# EAGLE board ShiftRegister32-1.0 (EAGLE 6.4)
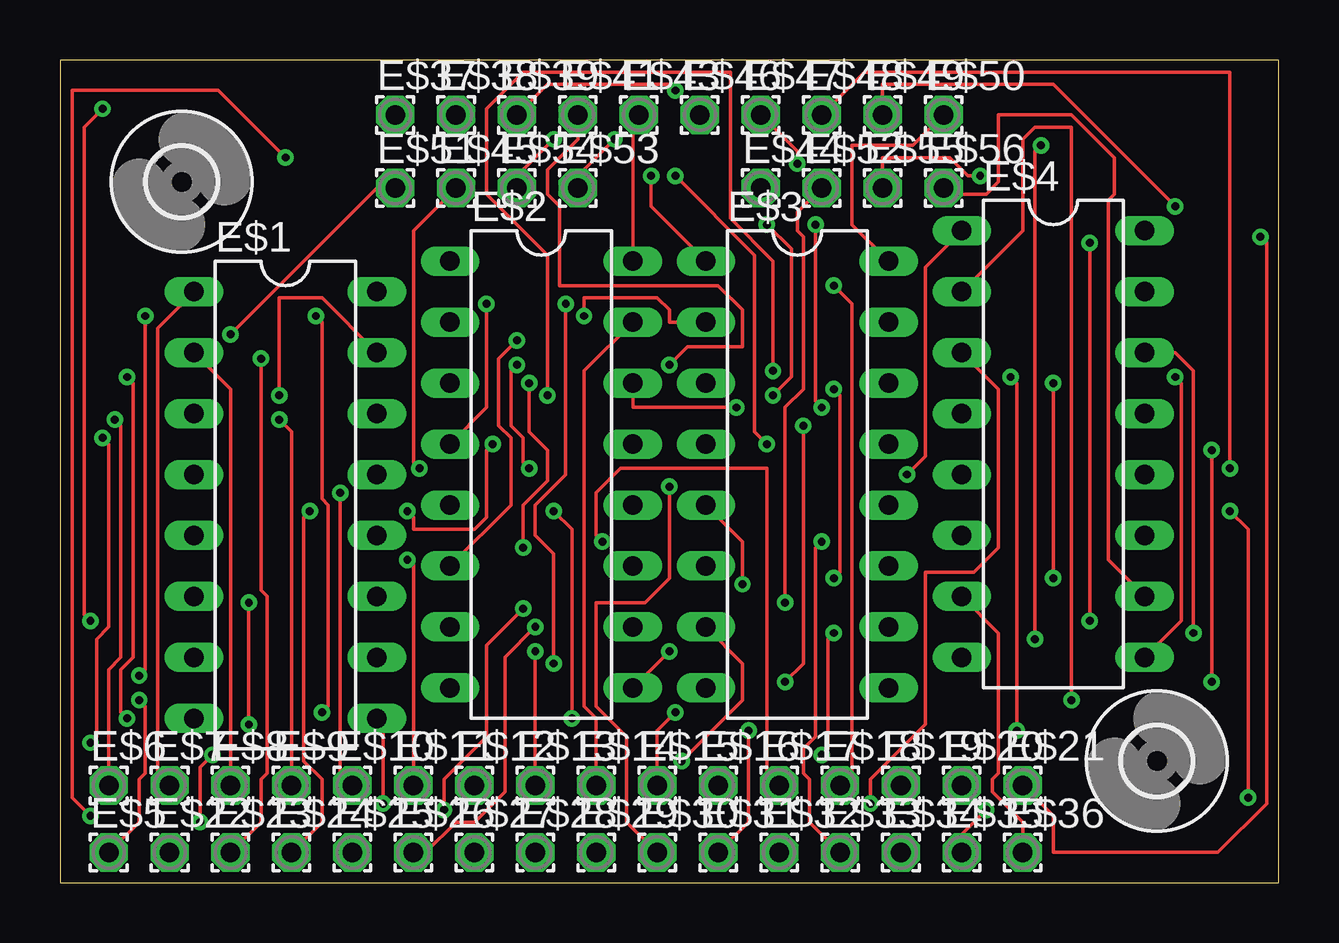
[diagram p0: board, top side]
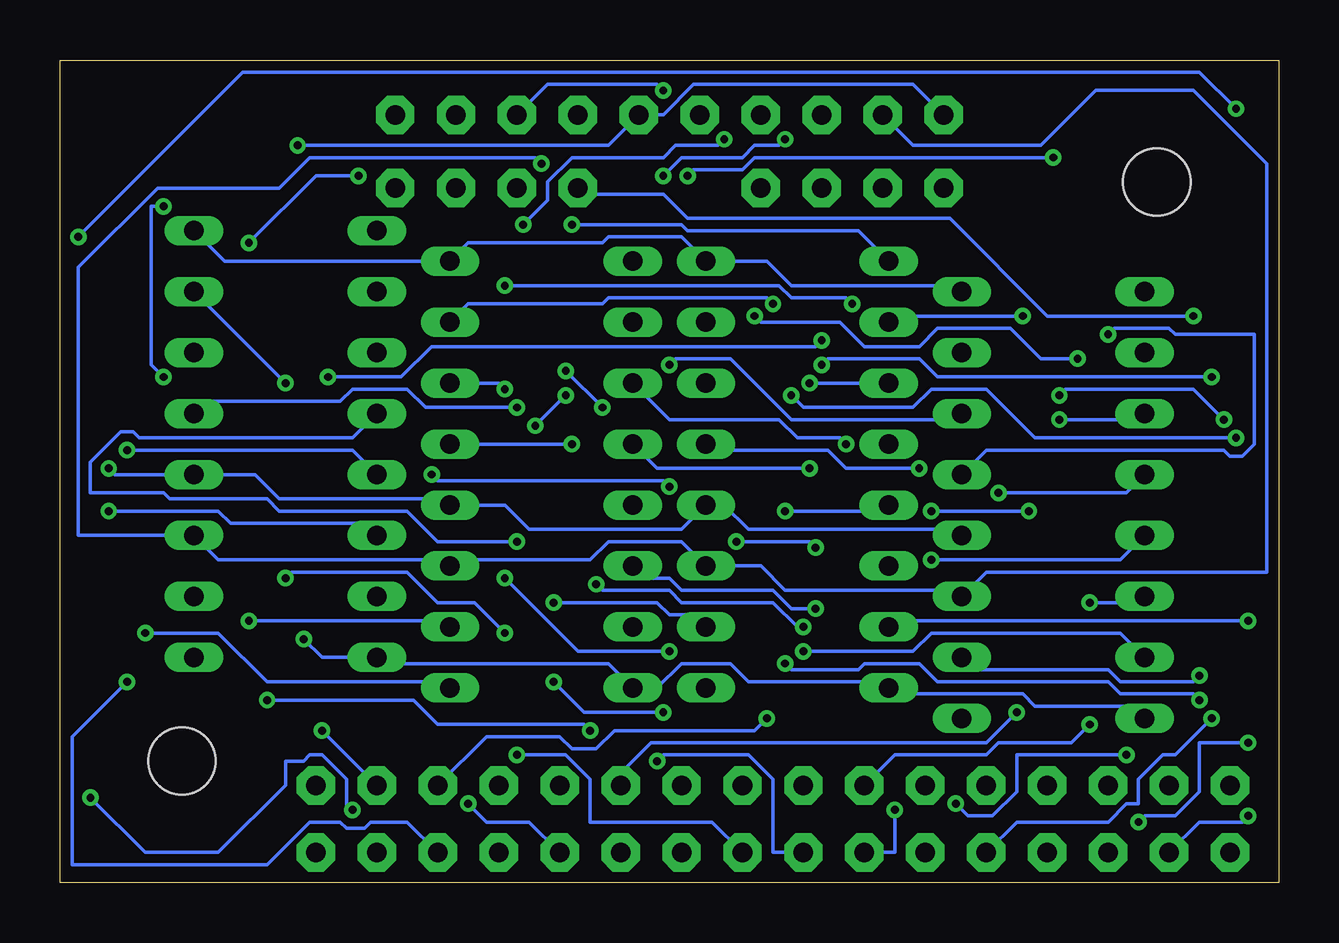
[diagram p1: board, bottom side, seen from below]

Size 50.8 x 34.29 mm. Coordinates in mm from the lower left corner, seen from the top.
Outline: 0,34.29 0,0 50.8,0 50.8,34.29 0,34.29
Copper layers (1*16): Top 0.0356mm / dielectric 1.5011mm / Bottom 0.0356mm
Design rules "LaenPCBOrder": minimum track width 6mil, minimum drill 13mil, track to track 6mil, track to pad 6mil, pad to pad 6mil, via to via 6mil, smd to smd 6mil, copper to edge 15mil, drill to drill 6mil, minimum pad ring 7mil, minimum via ring 7mil, stop-mask expansion 4mil, vias tented up to drill 0mil, thermal gap 10mil

## Footprints (pad centres in the part's own frame; a part is rotated, then mirrored left to right if it is on the bottom)
DIL16 = drill 0.813 long: 1 -8.89,-3.81; 2 -6.35,-3.81; 3 -3.81,-3.81; 4 -1.27,-3.81; 5 1.27,-3.81; 6 3.81,-3.81; 7 6.35,-3.81; 8 8.89,-3.81; 9 8.89,3.81; 10 6.35,3.81; 11 3.81,3.81; 12 1.27,3.81; 13 -1.27,3.81; 14 -3.81,3.81; 15 -6.35,3.81; 16 -8.89,3.81
1,6/0,8 = drill 0.813 pad 1.6 octagon: 1 0,0
2,8 = hole 2.8: 0,0

## Placement (x,y rotation side)
E$1  74HC595  [DIL16]  9.4,15.75 270 top
E$2  74HC595  [DIL16]  20.07,17.02 270 top
E$3  74HC595  [DIL16]  30.73,17.02 270 top
E$4  74HC595  [DIL16]  41.4,18.29 270 top
E$5  [1,6/0,8]  2.03,1.27 0 top
E$6  [1,6/0,8]  2.03,4.06 0 top
E$7  [1,6/0,8]  4.57,4.06 0 top
E$8  [1,6/0,8]  7.11,4.06 0 top
E$9  [1,6/0,8]  9.65,4.06 0 top
E$10  [1,6/0,8]  12.19,4.06 0 top
E$11  [1,6/0,8]  14.73,4.06 0 top
E$12  [1,6/0,8]  17.27,4.06 0 top
E$13  [1,6/0,8]  19.81,4.06 0 top
E$14  [1,6/0,8]  22.35,4.06 0 top
E$15  [1,6/0,8]  24.89,4.06 0 top
E$16  [1,6/0,8]  27.43,4.06 0 top
E$17  [1,6/0,8]  29.97,4.06 0 top
E$18  [1,6/0,8]  32.51,4.06 0 top
E$19  [1,6/0,8]  35.05,4.06 0 top
E$20  [1,6/0,8]  37.59,4.06 0 top
E$21  [1,6/0,8]  40.13,4.06 0 top
E$22  [1,6/0,8]  4.57,1.27 0 top
E$23  [1,6/0,8]  7.11,1.27 0 top
E$24  [1,6/0,8]  9.65,1.27 0 top
E$25  [1,6/0,8]  12.19,1.27 0 top
E$26  [1,6/0,8]  14.73,1.27 0 top
E$27  [1,6/0,8]  17.27,1.27 0 top
E$28  [1,6/0,8]  19.81,1.27 0 top
E$29  [1,6/0,8]  22.35,1.27 0 top
E$30  [1,6/0,8]  24.89,1.27 0 top
E$31  [1,6/0,8]  27.43,1.27 0 top
E$32  [1,6/0,8]  29.97,1.27 0 top
E$33  [1,6/0,8]  32.51,1.27 0 top
E$34  [1,6/0,8]  35.05,1.27 0 top
E$35  [1,6/0,8]  37.59,1.27 0 top
E$36  [1,6/0,8]  40.13,1.27 0 top
E$37  [1,6/0,8]  13.97,32 0 top
E$38  [1,6/0,8]  16.51,32 0 top
E$39  [1,6/0,8]  19.05,32 0 top
E$40  [2,8]  5.08,29.21 0 top
E$41  [1,6/0,8]  21.59,32 0 top
E$42  [2,8]  45.72,5.08 0 top
E$43  [1,6/0,8]  24.13,32 0 top
E$44  [1,6/0,8]  29.21,28.96 0 top
E$45  [1,6/0,8]  16.51,28.96 0 top
E$46  [1,6/0,8]  26.67,32 0 top
E$47  [1,6/0,8]  29.21,32 0 top
E$48  [1,6/0,8]  31.75,32 0 top
E$49  [1,6/0,8]  34.29,32 0 top
E$50  [1,6/0,8]  36.83,32 0 top
E$51  [1,6/0,8]  13.97,28.96 0 top
E$52  [1,6/0,8]  31.75,28.96 0 top
E$53  [1,6/0,8]  21.59,28.96 0 top
E$54  [1,6/0,8]  19.05,28.96 0 top
E$55  [1,6/0,8]  34.29,28.96 0 top
E$56  [1,6/0,8]  36.83,28.96 0 top

## Library data of the parts
E$1-E$4 = 40xx
E$5-E$39 E$41 E$43-E$56 = wirepad
E$40 E$42 = holes

## Nets
S$1: E$1.8 E$2.8 E$3.8 E$4.8 E$37.1 E$46.1
S$2: E$1.13 E$51.1
S$3: E$1.11 E$2.11 E$3.11 E$4.11 E$38.1 E$47.1
S$4: E$1.12 E$2.12 E$3.12 E$4.12 E$39.1 E$48.1
S$5: E$1.14 E$41.1
S$6: E$1.9 E$2.14
S$7: E$2.9 E$3.14
S$8: E$3.9 E$4.14
S$9: E$1.16 E$2.16 E$3.16 E$4.16 E$43.1 E$50.1
S$10: E$4.9 E$49.1
S$11: E$2.13 E$45.1
S$12: E$3.13 E$54.1
S$13: E$4.13 E$53.1
S$14: E$1.10 E$44.1
S$15: E$2.10 E$52.1
S$16: E$3.10 E$55.1
S$17: E$4.10 E$56.1
S$18: E$1.15 E$6.1
S$19: E$2.15 E$14.1
S$20: E$3.15 E$5.1
S$21: E$4.15 E$29.1
S$22: E$1.1 E$7.1
S$23: E$1.2 E$8.1
S$24: E$1.3 E$9.1
S$25: E$1.4 E$10.1
S$26: E$1.5 E$11.1
S$27: E$1.6 E$12.1
S$28: E$1.7 E$13.1
S$29: E$2.1 E$15.1
S$30: E$2.2 E$16.1
S$31: E$2.3 E$17.1
S$32: E$2.4 E$18.1
S$33: E$2.5 E$19.1
S$34: E$2.6 E$20.1
S$35: E$2.7 E$21.1
S$36: E$3.1 E$22.1
S$37: E$3.2 E$23.1
S$38: E$3.3 E$24.1
S$39: E$3.4 E$25.1
S$40: E$3.5 E$26.1
S$41: E$3.6 E$27.1
S$42: E$3.7 E$28.1
S$43: E$4.1 E$30.1
S$44: E$4.2 E$31.1
S$45: E$4.3 E$32.1
S$46: E$4.4 E$33.1
S$47: E$4.5 E$34.1
S$48: E$4.6 E$35.1
S$49: E$4.7 E$36.1

## Tracks (layer width: path | path; a pad name or v marks a point on that pad's centre or on a via)
S$1  (via drill 0.33)
  Top 0.152: v40.89,30.73 40.64,30.48 v40.64,10.16
  Bottom 0.152: E$37.1 15.24,33.27 24.38,33.27 25.65,32 E$46.1 27.94,30.73 v40.89,30.73 | E$1.8 6.1,7.37 10.16,7.37 10.67,7.87 16,7.87 E$2.8 16.51,8.38 22.1,8.38 22.86,9.14 24.89,9.14 25.91,8.13 E$3.8 27.94,9.14 37.34,9.14 E$4.8 39.88,9.4 v40.64,10.16
S$2  (via drill 0.33)
  Top 0.152: v7.11,22.86 13.21,28.96 E$51.1
  Bottom 0.152: E$1.13 12.19,18.03 2.29,18.03 2.03,17.78 1.52,17.78 1.02,18.29 1.02,22.86 4.32,22.86 4.57,23.11 6.86,23.11 v7.11,22.86
S$3  (via drill 0.33)
  Top 0.152: E$47.1 30.73,30.48 v30.73,29.97
  Bottom 0.152: v30.73,29.97 30.99,30.23 40.39,30.23 41.66,28.96 46.74,28.96 50.04,25.65 50.04,14.48 E$4.11 44.2,13.46 34.8,13.46 E$3.11 34.29,13.46 28.7,13.46 27.94,14.22 24.89,14.22 E$2.11 21.59,13.21 20.57,12.19 13.46,12.19 E$1.11 12.19,12.95 0.51,12.95 0.51,29.97 3.56,33.02 7.62,33.02 9.91,30.73 15.24,30.73 E$38.1
S$4  (via drill 0.33)
  Top 0.152: E$39.1 20.32,33.27 25.65,33.27 v25.65,33.02 | E$48.1 33.53,33.78 48.77,33.78 v48.77,17.27
  Bottom 0.152: v25.65,33.02 25.91,33.27 30.48,33.27 E$48.1 | E$1.12 13.46,14.73 22.1,14.73 23.11,15.75 E$2.12 24.89,14.73 31.24,14.73 32.26,15.75 E$3.12 34.8,16 41.66,16 42.67,17.02 E$4.12 48.51,17.02 v48.77,17.27
S$5  (via drill 0.33)
  Top 0.152: v25.4,21.59 26.16,22.35 28.45,22.35 28.45,23.88 27.43,24.89 20.83,24.89 20.83,28.19 20.32,28.7 20.32,29.72 21.59,30.99 E$41.1
  Bottom 0.152: E$1.14 13.46,19.3 20.32,19.3 22.86,21.84 25.15,21.84 v25.4,21.59
S$6  (via drill 0.33)
  Top 0.152: E$1.9 13.46,6.6 v13.46,3.3 | v6.35,5.33 5.84,4.83 v5.84,2.54 | v1.27,5.84 1.52,6.1 1.52,10.16 2.03,10.67 2.03,18.29 v1.78,18.54 | v20.32,20.32 20.32,26.16 17.78,28.7 17.78,32.26 19.3,33.78 27.94,33.78 27.94,27.69 29.72,25.91 v29.72,21.34 | v28.19,19.81 23.88,19.81 E$2.14
  Bottom 0.152: v13.46,3.3 12.95,2.79 11.94,2.79 10.92,3.81 10.92,5.33 v6.35,5.33 | v5.84,2.54 5.59,2.79 4.32,2.79 3.3,3.81 3.3,5.84 v1.27,5.84 | v1.78,18.54 10.16,18.54 12.19,20.57 14.48,20.57 15.24,19.81 19.81,19.81 v20.32,20.32 | v28.19,19.81 v29.72,21.34
S$7  (via drill 0.33)
  Top 0.152: v25.4,9.65 E$2.9 | v32.26,12.7 32.51,12.95 32.51,20.32 v32.26,20.57
  Bottom 0.152: v25.4,9.65 29.21,9.65 v32.26,12.7 | v32.26,20.57 32.51,20.83 E$3.14
S$8  (via drill 0.33)
  Top 0.152: v47.24,10.41 47.24,21.34 46.48,22.1 E$4.14
  Bottom 0.152: E$3.9 34.8,8.38 42.16,8.38 44.2,10.41 v47.24,10.41
S$9
  Top 0.152: E$50.1 35.56,30.73 33.02,30.73 33.02,27.43 E$3.16 | E$43.1 23.88,31.75 E$2.16
  Bottom 0.152: E$4.16 43.94,25.91 E$3.16 33.78,26.67 28.19,26.67 27.94,26.92 24.89,26.92 E$2.16 21.34,25.91 20.32,24.89 13.46,24.89 E$1.16
S$10  (via drill 0.33)
  Top 0.152: E$4.9 46.74,10.92 46.74,20.83 v46.48,21.08 | v46.48,28.19 41.4,33.27 34.29,33.27 E$49.1
  Bottom 0.152: v46.48,21.08 46.99,21.59 46.99,28.19 v46.48,28.19
S$11  (via drill 0.33)
  Top 0.152: v14.99,17.27 14.73,17.53 14.73,27.18 E$45.1
  Bottom 0.152: E$2.13 23.62,18.03 18.8,18.03 18.03,17.27 v14.99,17.27
S$12  (via drill 0.33)
  Top 0.152: v29.46,18.29 28.96,18.8 28.96,26.16 v25.65,29.46 | v20.57,30.99 19.05,29.46 E$54.1
  Bottom 0.152: v29.46,18.29 E$3.13 | v25.65,29.46 24.89,30.23 22.35,30.23 21.84,30.73 20.83,30.73 v20.57,30.99
S$13  (via drill 0.33)
  Top 0.152: v31.75,19.81 31.5,20.07 v31.5,27.43 | v23.11,30.99 21.59,29.46 E$53.1
  Bottom 0.152: E$4.13 44.7,20.07 39.12,20.07 38.61,20.57 36.32,20.57 35.56,19.81 v31.75,19.81 | v31.5,27.43 30.48,28.45 30.48,29.21 29.46,30.23 25.65,30.23 25.15,30.73 23.37,30.73 v23.11,30.99
S$14  (via drill 0.33)
  Top 0.152: v3.3,8.64 3.56,8.89 v3.56,23.62
  Bottom 0.152: E$1.10 12.7,8.89 7.11,8.89 6.6,8.38 3.56,8.38 v3.3,8.64 | v3.56,23.62 9.65,23.62 13.72,27.69 24.64,27.69 25.65,28.7 28.96,28.7 E$44.1
S$15  (via drill 0.33)
  Top 0.152: v30.23,11.68 30.23,19.81 30.99,20.57 30.99,26.92 30.73,27.18 30.73,27.94 E$52.1
  Bottom 0.152: E$2.10 24.38,11.18 25.4,11.18 25.91,11.68 v30.23,11.68
S$16  (via drill 0.33)
  Top 0.152: v42.93,26.67 v42.93,10.92 | v38.35,29.46 37.85,29.46 37.08,30.23 34.29,30.23 E$55.1
  Bottom 0.152: E$3.10 34.8,10.92 v42.93,10.92 | v42.93,26.67 40.13,29.46 v38.35,29.46
S$17
  Top 0.152: E$4.10 43.69,13.46 43.69,28.45 43.94,28.7 43.94,30.23 42.16,32 39.12,32 39.12,29.21 38.61,28.7 36.83,28.7 E$56.1
S$18  (via drill 0.33)
  Top 0.152: E$1.15 10.92,24.38 9.14,24.38 v9.14,20.32 | v2.29,19.3 2.54,19.05 2.54,9.4 2.03,8.89 E$6.1
  Bottom 0.152: v9.14,20.32 8.89,20.57 3.56,20.57 v2.29,19.3
S$19
  Top 0.152: E$2.15 21.84,21.34 21.84,7.37 22.35,6.86 E$14.1
S$20  (via drill 0.33)
  Top 0.152: v21.08,24.13 21.08,17.02 19.81,15.75 19.81,14.48 20.57,13.72 v20.57,9.14 | v3.3,7.62 3.56,7.37 3.56,4.57 3.3,4.32 3.3,2.54 E$5.1
  Bottom 0.152: E$3.15 33.78,24.13 28.19,24.13 27.94,24.38 21.34,24.38 v21.08,24.13 | v20.57,9.14 20.32,8.89 17.53,8.89 17.27,9.14 14.99,9.14 14.22,8.38 7.11,8.38 6.6,7.87 3.56,7.87 v3.3,7.62
S$21  (via drill 0.33)
  Top 0.152: v41.4,12.7 v41.4,20.83 | v32.26,10.41 32,10.16 32,5.59 v31.75,5.33
  Bottom 0.152: v41.4,20.83 E$4.15 | v41.4,12.7 41.15,12.95 36.32,12.95 35.05,11.68 33.53,11.68 v32.26,10.41 | v31.75,5.33 29.72,5.33 28.7,4.32 28.7,2.54 23.62,2.54 E$29.1
S$22
  Top 0.152: E$1.1 4.06,23.11 4.06,4.57 E$7.1
S$23
  Top 0.152: E$1.2 7.11,20.57 E$8.1
S$24  (via drill 0.33)
  Top 0.152: v9.14,19.3 9.65,18.8 E$9.1
  Bottom 0.152: E$1.3 5.84,19.3 v9.14,19.3
S$25  (via drill 0.33)
  Top 0.152: v11.68,16.26 11.68,4.57 E$10.1
  Bottom 0.152: E$1.4 6.35,16.26 v11.68,16.26
S$26  (via drill 0.33)
  Top 0.152: v14.48,13.46 14.73,13.21 E$11.1
  Bottom 0.152: E$1.5 6.6,13.46 v14.48,13.46
S$27  (via drill 0.33)
  Top 0.152: v7.87,6.6 v7.87,11.68
  Bottom 0.152: E$1.6 5.84,11.68 v7.87,11.68 | v7.87,6.6 8.64,5.84 11.68,5.84 12.19,5.33 16,5.33 E$12.1
S$28  (via drill 0.33)
  Top 0.152: E$13.1 v19.81,9.65
  Bottom 0.152: E$1.7 6.6,10.41 14.48,10.41 15.24,9.65 v19.81,9.65
S$29  (via drill 0.33)
  Top 0.152: v29.46,27.43 30.48,26.42 30.48,21.08 v29.72,20.32 | v30.99,19.05 30.99,9.14 v30.23,8.38 | v25.65,7.11 24.89,6.35 E$15.1
  Bottom 0.152: E$2.1 17.53,27.18 24.64,27.18 24.89,27.43 v29.46,27.43 | v30.99,19.05 v29.72,20.32 | v30.23,8.38 28.96,7.11 v25.65,7.11
S$30  (via drill 0.33)
  Top 0.152: v10.67,23.62 10.92,23.37 10.92,16 11.18,15.75 11.18,7.37 v10.92,7.11
  Bottom 0.152: E$2.2 16,23.62 v10.67,23.62 | v10.92,7.11 12.19,5.84 26.16,5.84 27.43,4.57 E$16.1
S$31  (via drill 0.33)
  Top 0.152: v19.56,20.83 19.56,18.8 20.32,18.03 20.32,16.76 19.3,15.75 v19.3,13.97 | v22.61,14.22 22.35,14.48 22.35,16.26 23.37,17.27 29.46,17.27 29.46,4.57 E$17.1
  Bottom 0.152: v19.56,20.83 E$2.3 | v19.3,13.97 19.56,14.22 v22.61,14.22
S$32  (via drill 0.33)
  Top 0.152: E$2.4 17.78,19.81 v17.78,24.13 | v32.26,24.89 33.02,24.13 33.02,4.57 E$18.1
  Bottom 0.152: v17.78,24.13 18.03,24.38 20.32,24.38 20.83,24.89 v32.26,24.89
S$33  (via drill 0.33)
  Top 0.152: v20.57,15.49 21.34,14.73 v21.34,6.86
  Bottom 0.152: E$2.5 16.51,15.49 v20.57,15.49 | v21.34,6.86 21.84,6.35 27.69,6.35 28.45,5.59 29.46,5.59 29.97,6.1 33.02,6.1 E$19.1
S$34  (via drill 0.33)
  Top 0.152: E$2.6 18.8,15.75 18.8,18.54 18.29,19.05 18.29,21.84 v19.05,22.61 | v39.62,21.08 39.88,20.83 v39.88,6.35
  Bottom 0.152: v19.05,22.61 19.3,22.35 35.31,22.35 36.58,21.08 v39.62,21.08 | E$20.1 v39.88,6.35
S$35  (via drill 0.33)
  Top 0.152: v1.27,10.92 1.02,11.18 1.02,31.5 v1.78,32.26 | v50.04,26.92 50.29,26.67 50.29,3.3 48.26,1.27 41.4,1.27 41.4,2.79 E$21.1
  Bottom 0.152: E$2.7 16,10.92 v1.27,10.92 | v1.78,32.26 3.3,33.78 43.18,33.78 v50.04,26.92
S$36  (via drill 0.33)
  Top 0.152: E$3.1 24.64,28.19 v24.64,29.46 | v9.4,30.23 6.6,33.02 0.51,33.02 0.51,3.56 v1.27,2.79
  Bottom 0.152: v24.64,29.46 24.38,29.72 22.35,29.72 21.84,30.23 v9.4,30.23 | v1.27,2.79 1.52,2.54 3.3,2.54 E$22.1
S$37  (via drill 0.33)
  Top 0.152: E$3.2 25.4,23.37 25.4,23.88 24.89,24.38 21.84,24.38 v21.84,23.62 | v8.38,21.84 8.38,12.19 8.64,11.94 8.64,4.57 8.38,4.32 8.38,2.54 E$23.1
  Bottom 0.152: v21.84,23.62 21.59,23.37 18.29,23.37 17.27,22.35 14.99,22.35 14.22,23.11 11.18,23.11 9.91,21.84 v8.38,21.84
S$38  (via drill 0.33)
  Top 0.152: v18.03,18.29 17.78,18.03 17.78,15.24 17.27,14.73 14.73,14.73 14.73,15.24 v14.48,15.49 | v10.41,15.49 10.16,15.24 10.16,5.08 10.92,4.32 10.92,2.54 E$24.1
  Bottom 0.152: E$3.3 25.4,19.3 20.83,19.3 20.07,18.54 18.29,18.54 v18.03,18.29 | v10.41,15.49 v14.48,15.49
S$39  (via drill 0.33)
  Top 0.152: v19.56,17.27 19.3,17.53 19.3,18.54 18.8,19.05 18.8,21.34 v19.05,21.59 | v2.79,21.08 3.05,20.83 3.05,9.4 2.54,8.89 2.54,7.11 v2.79,6.86
  Bottom 0.152: E$3.4 25.91,17.27 v19.56,17.27 | v19.05,21.59 18.8,21.84 14.99,21.84 14.22,21.08 v2.79,21.08 | v2.79,6.86 4.32,5.33 4.83,5.33 5.84,4.32 5.84,3.3 6.35,3.3 7.11,2.54 10.92,2.54 E$25.1
S$40  (via drill 0.33)
  Top 0.152: E$3.5 28.45,14.22 v28.45,12.45 | v19.81,10.67 18.54,9.4 18.54,3.81 17.27,2.54 16.51,2.54 15.24,1.27 E$26.1
  Bottom 0.152: v28.45,12.45 28.19,12.19 25.4,12.19 24.89,11.68 21.08,11.68 20.07,10.67 v19.81,10.67
S$41  (via drill 0.33)
  Top 0.152: v19.3,11.43 17.78,9.91 17.78,6.1 16,4.32 v16,3.05
  Bottom 0.152: E$3.6 26.42,12.7 25.4,12.7 24.89,12.19 21.08,12.19 20.32,11.43 v19.3,11.43 | v16,3.05 16,1.27 E$27.1
S$42  (via drill 0.33)
  Top 0.152: E$3.7 28.45,9.14 28.45,7.62 v25.91,5.08
  Bottom 0.152: v25.91,5.08 25.65,5.33 22.1,5.33 21.08,4.32 21.08,1.27 E$28.1
S$43  (via drill 0.33)
  Top 0.152: E$4.1 36.07,25.65 36.07,17.78 v35.31,17.02 | v25.4,16.51 25.4,12.7 24.38,11.68 22.35,11.68 22.35,7.37 23.62,6.1 23.62,2.54 E$30.1
  Bottom 0.152: v35.31,17.02 35.05,16.76 25.65,16.76 v25.4,16.51
S$44  (via drill 0.33)
  Top 0.152: E$4.2 40.13,27.18 40.13,30.99 40.64,31.5 42.16,31.5 v42.16,7.62 | v28.7,6.35 28.7,2.54 E$31.1
  Bottom 0.152: v42.16,7.62 36.07,7.62 35.05,6.6 28.96,6.6 v28.7,6.35
S$45  (via drill 0.33)
  Top 0.152: E$4.3 39.12,20.57 39.12,13.97 38.1,12.95 36.07,12.95 36.07,6.6 33.78,4.32 v33.78,3.3
  Bottom 0.152: v33.78,3.3 33.02,2.54 31.24,2.54 E$32.1
S$46  (via drill 0.33)
  Top 0.152: v31.75,14.22 31.5,13.97 31.5,6.1 30.99,5.59 30.99,4.57 31.24,4.32 31.24,2.54 E$33.1
  Bottom 0.152: E$4.4 38.61,18.54 47.5,18.54 47.75,18.8 48.26,18.8 49.53,17.53 49.53,16.26 46.48,16.26 46.23,16 42.16,16 41.66,15.49 36.32,15.49 35.05,14.22 v31.75,14.22
S$47  (via drill 0.33)
  Top 0.152: v48.01,8.38 v48.01,18.03
  Bottom 0.152: E$4.5 38.61,18.03 v48.01,18.03 | v48.01,8.38 50.29,6.1 50.29,0.76 42.16,0.76 40.39,2.54 39.12,2.54 38.86,2.29 38.1,2.29 37.85,2.54 36.32,2.54 E$34.1
S$48  (via drill 0.33)
  Top 0.152: v48.77,15.49 49.53,14.73 v49.53,3.56 | v38.61,3.05 37.59,2.03 E$35.1
  Bottom 0.152: E$4.6 38.1,14.99 43.69,14.99 44.2,15.49 v48.77,15.49 | v49.53,3.56 47.24,1.27 44.2,1.27 41.4,4.06 41.4,5.08 40.64,5.08 40.39,5.33 39.88,5.33 38.86,4.32 38.86,3.05 v38.61,3.05
S$49
  Top 0.152: E$4.7 39.12,10.41 39.12,4.57 38.86,4.32 38.86,3.81 40.13,2.54 E$36.1

## Text on the board
tNames: Shift Register Bank | GND | SHCP | STCP | DSI | VCC | GND | SHCP | STCP | DSO | VCC | ____ | ____ | ____ | ____ | ____ | ____ | ____ | ____ | OE0 | OE1 | OE2 | OE3 | MR0 | MR1 | MR2 | MR3 | 0 | 1 | 2 | 3 | 4 | 5 | 6 | 7 | 8 | 9 | 10 | 11 | 12 | 13 | 14 | 15 | 16 | 17 | 18 | 19 | 20 | 21 | 22 | 23 | 24 | 25 | 26 | 27 | 28 | 29 | 30 | 31 | Brent M. Spell